# Altium PCB STM8S103F30P6最小系统.PcbDoc
Units mil, origin at the board's own origin, x right, y up, seen from the top; angles counter-clockwise.
Board outline 6000 x 4000 mil, 2 copper layers (Top Layer, Bottom Layer); 28 components, 23 nets, 133 pads, 0 vias.
Unrouted connection lines stored in the file: 9.
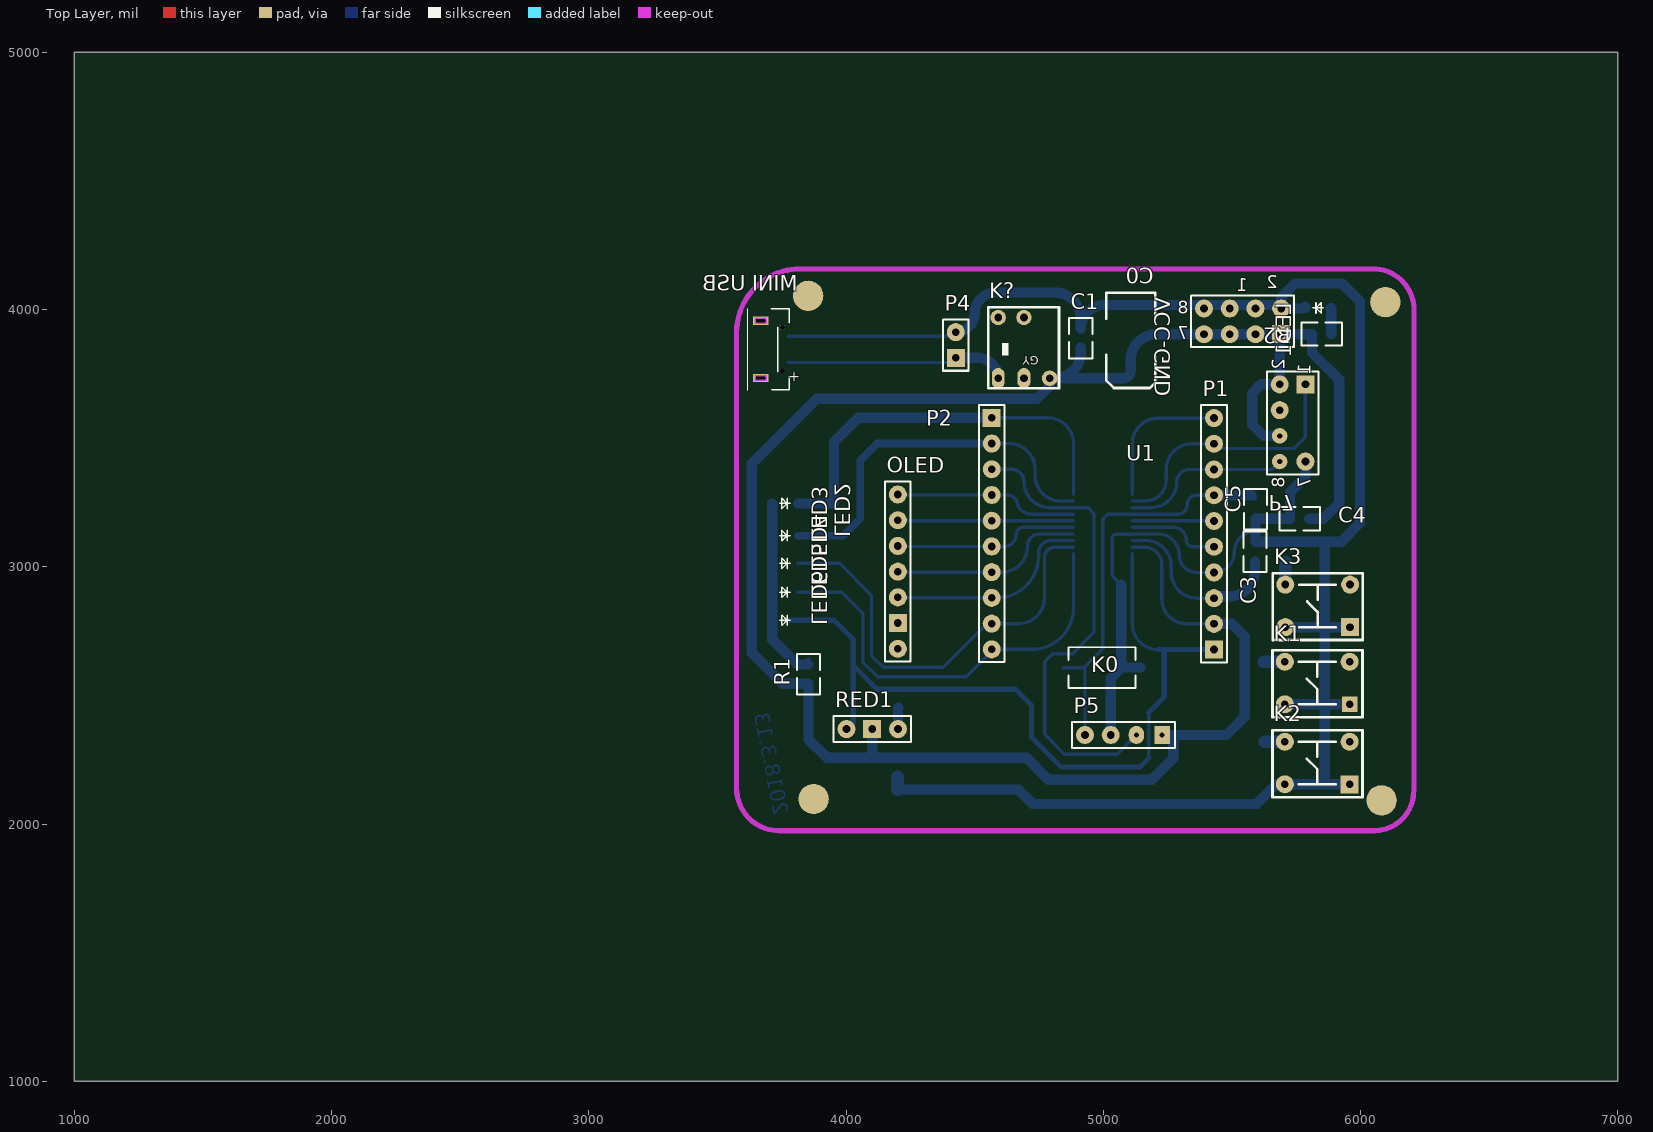
[diagram p0: Top Layer view]
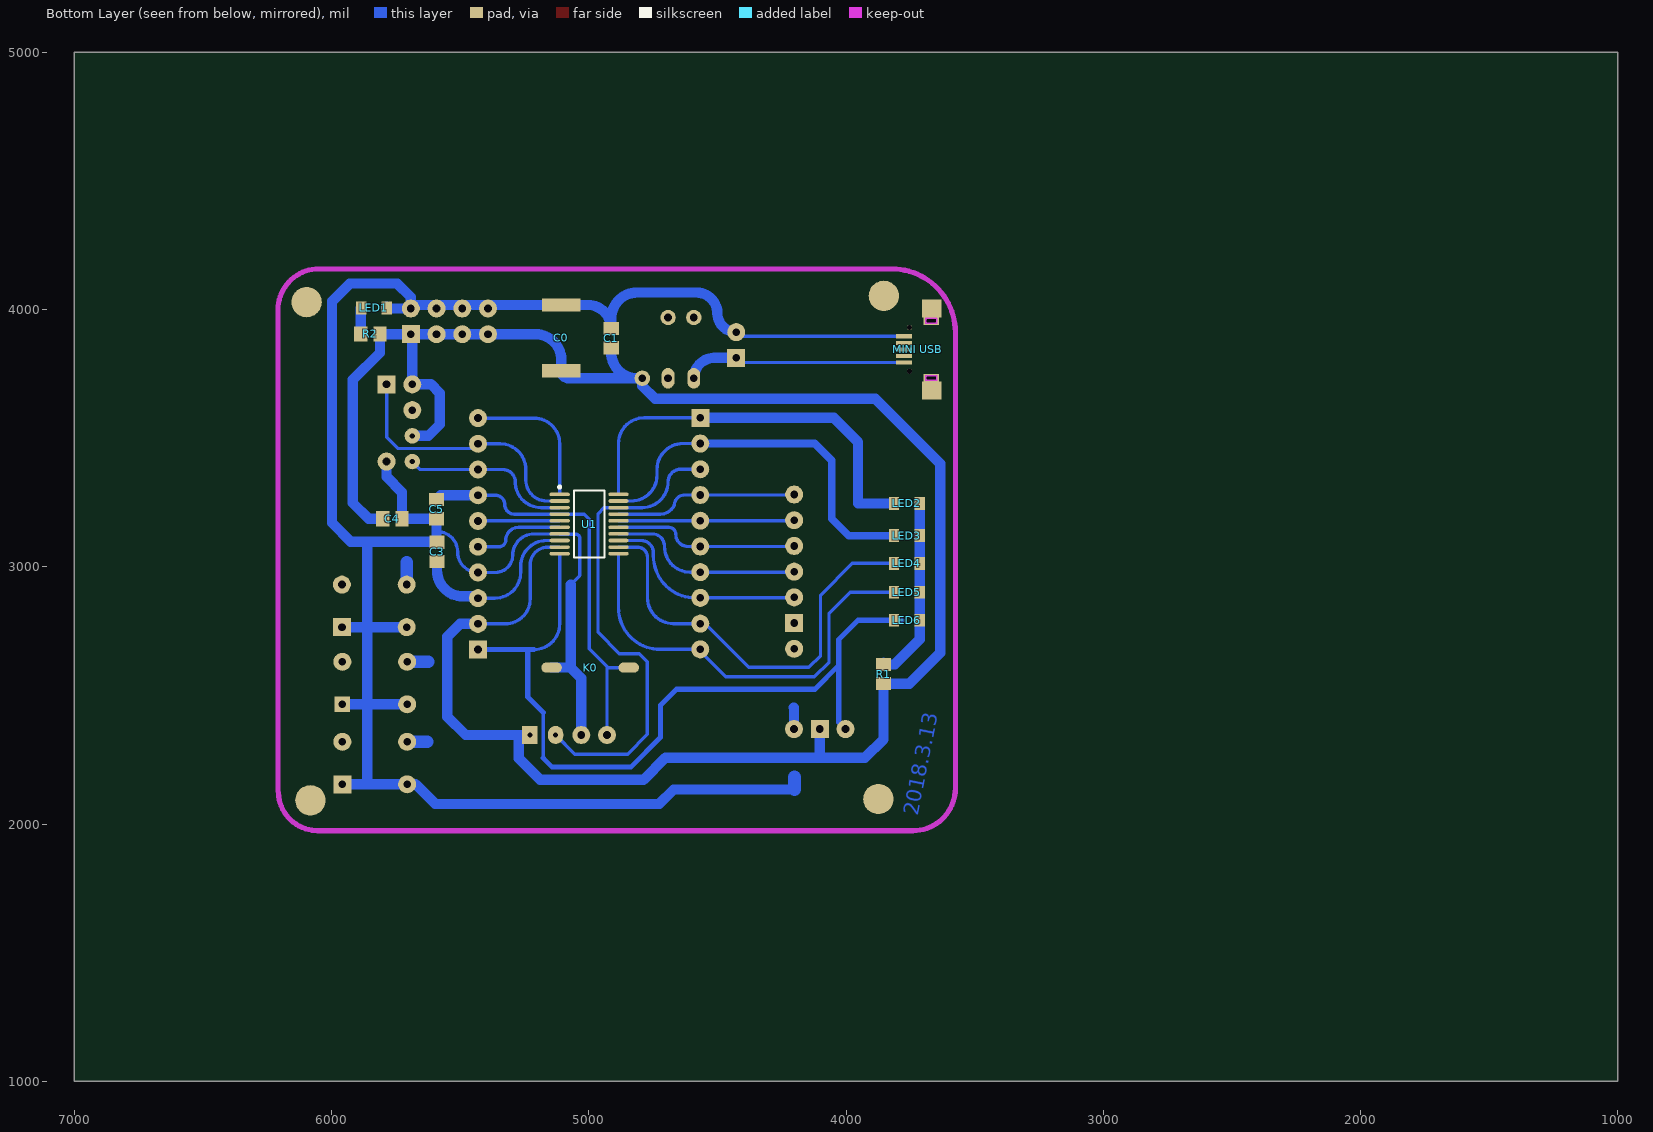
[diagram p1: Bottom Layer view, seen from below]

## Layer stack, top to bottom
Top Solder: solder mask 0.4, Solder Resist, Dk 3.5
Top Layer: signal copper 1.4
Dielectric 1: dielectric 12.6, FR-4, Dk 4.8
Bottom Layer: signal copper 1.4
Bottom Solder: solder mask 0.4, Solder Resist, Dk 3.5

## Board outline
1000,1000 7000,1000 7000,5000 1000,5000

## Design rules (kind name [scope] priority, off if disabled: settings)
Clearance [All] p1: gap=8
PolygonConnect [All] p1: connectstyle=Relief reliefconductorwidth=10 reliefentries=4 polygonreliefangle="90 Angle" airgapwidth=10
RoutingVias [All] p1: holewidth=28 width=50 viastyle="Through Hole" minholewidth=28 minwidth=50 maxholewidth=28 maxwidth=50
SolderMaskExpansion [All] p1: expansion=4
Width [All] p1: maxlimit=50 minlimit=13 preferedwidth=40
30 further rules are at their usual default settings.

## Components (designator, comment, footprint, x,y, rotation, side; value= is the part's Value field where it differs from the comment)
C0 "100uF" "Pol Cap(220uF)" 5191.7,3725 r90 top
C1 "" 0805 4917.7,3889 r270 top
C3 "" 0805 5594.7,3058 r270 top
C4 "0.1uF" 0805 5763.7,3192 r0 top
C5 "0.1uF" 0805 5586.7,3224 r90 top
K0 "Key Press" K_Press 5164.7,2513 r180 top
K1 "" 按键#1 5957,2463 r180 top
K2 "" 按键#2 5957,2152 r180 top
K3 "" 按键#2 5958.7,2763 r180 top
K? "六脚开关" 按钮开关 4591.7,3969 r90 top
LED1 "LED" LED(0805) 5835,4006 r180 top
LED2 "" LED(0805) 3763,3246 r0 top
LED3 "" LED(0805) 3763,3121 r0 top
LED4 "" LED(0805) 3763,3013 r0 top
LED5 "" LED(0805) 3763,2901 r0 top
LED6 "" LED(0805) 3763,2792 r0 top
"MINI USB" "" MICRO-USB 3688,3845 r90 top
OLED "Header 7" HDR1X7 4201.51,2681.01 r90 top
P1 "Header 10" HDR1X10 5430.51,2678.01 r90 top
P2 "Header 10" HDR1X10 4566.51,3579.01 r270 top
P4 "Header 2" HDR1X2 4426.7,3812 r90 top
P5 "Header 4" HDR1X4 5229,2346 r180 top
P7 "WIFI" HDR2X4#1 5786,3709 r270 top
R1 "560R" 0805 3849,2583 r90 top
R2 "560R" 0805 5849,3900 r180 top
RED1 "Header 3" HDR1X3 4002,2369 r0 top
U1 "STM8S003F3P6" "SOP20 - duplicate" 4994.51,3177.01 r0 top
VCC-GND "WIFI" HDR2X4#2 5691.7,3904 r180 top

## Footprints (in the part's own frame and the unit in brackets; to place one, negate y for a bottom-side part, rotate by r counter-clockwise, add the part's x,y. Pads: shape width x height; smd on the part's side, far side on the other; paste and mask are expansions set on the pad)
0805 [mm]
  rect 1.3x1.5 smd far side: 1(-0.95,-0.127) 2(0.95,-0.127)
  silkscreen extent -2,-1.28 2,1.02, body extent -1,-0.76 1,0.5, height 0.55
HDR1X2 [mil] "Connector; Header; 2 Position"
  rect 70x70 hole 30: 1(0,0)
  round 70 hole 30: 2(100,0)
  silkscreen extent -50,-50 150,50
HDR1X3 [mil] "Connector; Header; 3 Position"
  round 70 hole 30: 1(0,0) 3(200,0)
  rect 70x70 hole 30: 2(100,0)
  silkscreen extent -50,-50 250,50
HDR1X4 [mil] "Connector; Header; 4 Position"
  rect 60x70 hole 20: 1(0,0)
  oval 60x70 hole 20: 2(100,0)
  round 70 hole 30: 3(200,0) 4(300,0)
  silkscreen extent -50,-50 350,50
HDR1X7 [mil] "Connector; Header; 7 Position"
  round 70 hole 30: 1(0,0) 3(200,0) 4(300,0) 5(400,0) 6(500,0) 7(600,0)
  rect 70x70 hole 30: 2(100,0)
  silkscreen extent -50,-50 650,50
HDR1X10 [mil] "Connector; Header; 10 Position"
  rect 70x70 hole 30: 1(0,0)
  round 70 hole 30: 2(100,0) 3(200,0) 4(300,0) 5(400,0) 6(500,0) 7(600,0) 8(700,0) 9(800,0) 10(900,0)
  silkscreen extent -50,-50 950,50
HDR2X4#1 [mil] "Connector; Header; 4x2 Position"
  rect 70x70 hole 30: 1(0,0)
  round 70 hole 30: 2(0,-100) 4(100,-100) 7(300,0)
  round 0 all layers, no hole: 3(100,0) 5(200,0)
  round 60 hole 20: 6(200,-100) 8(300,-100)
  silkscreen extent -50,-150 350,50
HDR2X4#2 [mil] "Connector; Header; 4x2 Position"
  rect 70x70 hole 30: 1(0,0)
  round 70 hole 30: 2(0,-100) 3(100,0) 4(100,-100) 5(200,0) 6(200,-100) 7(300,0) 8(300,-100)
  silkscreen extent -50,-150 350,50
K_Press [mil]
  oval 80x40 smd far side: 1(20,-95) 2(320,-95)
  silkscreen extent 40,-174 300,-16, body extent 50,-167 290,-21, height 98
LED(0805) [mil]
  rect 40x50 smd far side: 1(-50,0) 2(50,0)
  silkscreen extent -20,-20 20,20, body extent -37,-25 43,24, height 43
MICRO-USB [mm]
  rect 0.4x1.55 smd far side: 1(-1.3,-2.2) 2(-0.65,-2.2) 3(0,-2.2) 4(0.65,-2.2) 5(1.3,-2.2)
  rect 1.8x1.9 smd far side: 6(-4.05,0.55) 6(4.05,0.55)
  rect 0.8x1.5 hole 0.4 slot 1 at 90 deg: 6(-2.825,0.5) 6(2.825,0.5)
  round 0.5 hole 0.5 unplated: ""(-2.159,-1.651) ""(2.159,-1.651)
  Keep-Out Layer lines w0.127: -3.054,1.043 -2.596,1.043 -2.596,-0.075 -3.054,-0.075 -3.054,1.043 ; 2.596,1.043 3.054,1.043 3.054,-0.075 2.596,-0.075 2.596,1.043
  silkscreen extent -4.05,-2.3 4,1.8
"Pol Cap(220uF)" [mm]
  rect 1.3x3.8 smd far side: 1(0.941,2.159) 2(7.441,2.159)
  silkscreen extent -0.76,-0.25 8.64,4.57
"SOP20 - duplicate" [mm]
  oval 2x0.35 smd far side: 1(3.009,2.647) 2(3.009,1.997) 3(3.009,1.347) 4(3.009,0.697) 5(3.009,0.047) 6(3.009,-0.603) 7(3.009,-1.253) 8(3.009,-1.903) 9(3.009,-2.553) 10(3.009,-3.203) 11(-2.791,-3.203) 12(-2.791,-2.553) 13(-2.791,-1.903) 14(-2.791,-1.253) 15(-2.791,-0.603) 16(-2.791,0.047) 17(-2.791,0.697) 18(-2.791,1.347) 19(-2.791,1.997) 20(-2.791,2.647)
按钮开关 [mil]
  oval 80x50 hole 30: 1(-236.22,0) 2(-236.22,-100)
  round 60 hole 30: 3(-236.22,-200) 5(0,-100) 6(0,0)
  round 0 all layers, no hole: 4(0,-200)
  silkscreen extent -276,-236 39,39
按键#1 [mil]
  rect 60x60 hole 30: 1(-0.98,-2.32)
  round 70 hole 30: 1(250.98,-2.32) 2(-0.98,-167.68) 2(250.98,-167.68)
  silkscreen extent -51,-212 299,48
按键#2 [mil]
  rect 70x70 hole 30: 1(-0.98,-2.32)
  round 70 hole 30: 1(250.98,-2.32) 2(-0.98,-167.68) 2(250.98,-167.68)
  silkscreen extent -51,-212 299,48

## Part data
C0: library part "pol cap", "通用有极电容"
C1 C3 C4 C5: library part Cap, "无极电容"
K0: library part K_Press, "贴片按键"
K1 K2 K3: library part 按键
K?: "按钮开关"
LED1: "发光二极管"
LED2 LED3 LED4 LED5 LED6: library part LED, "发光二极管"
"MINI USB": library part Component_1
OLED: "Header, 7-Pin"
P1 P2: "Header, 10-Pin"
P4: "Header, 2-Pin"
P5: "Header, 4-Pin"
P7 VCC-GND: library part "Header 4X2", "Header, 4-Pin, Dual row"
R1 R2: library part Res, "通用电阻"
RED1: "Header, 3-Pin"

## Free pads (board coordinates)
  round 118.11 all layers, no hole: 0(3853,4053) 0(3874,2097) 0(6082,2092) 0(6097,4029)

## Nets (pads, with @x,y where several pads share a name; then routed paths per layer and width w, separated by ;. In a path a pad name is that pad's centre, name@x,y a point inside that pad or via, vN(x,y) a via of type N, cw(c..) or ccw(c..) an arc to the next point about the centre after c; other vN are vias at no path point)
A1: K1.2 P1.6 U1.5 | length 400
  Bottom Layer w13: U1.5 5429.66,3178.86 cw(c5429.66,3178.01) P1.6
  Bottom Layer w50: 5624,2630.68 K1.2@5706.02,2630.68
A2: K2.2 P1.5 U1.6 | length 438.5
  Bottom Layer w13: U1.6 5272.43,3153.27 cw(c5272.43,3103) 5322.7,3103 ccw(c5347.69,3103) 5347.69,3078.01 P1.5
  Bottom Layer w50: 5628,2319.68 K2.2@5706.02,2319.68
A3: LED6.2 P1.1 RED1.1 U1.10 | length 3263
  Bottom Layer w13: RED1.1 4028,2395 ; U1.10 5112.97,2778.01 ccw(c5212.97,2778.01) 5212.97,2678.01 ; 5177,2256 5177,2434
  Bottom Layer w20: 3783,2792 LED6.2 3953,2792 4028,2717 ; 4028,2395 4028,2717 ; 5177,2256 5142,2221 4837,2221 4721,2337 4721,2462 4659,2524 4121,2524 4028,2617 4028,2717 ; 5177,2434 5237,2494 5237,2678.01 ; 5212.97,2678.01 5237,2678.01 ; 5364.01,2678.01 5331.01,2678.01 ; P1.1 5331.01,2678.01 ; 5237,2678.01 5331.01,2678.01
B4: LED4.2 P2.9 U1.12 | length 1685.2
  Bottom Layer w13: LED4.2 3976,3013 4099,2890 4099,2654 4144,2609 4378,2609 4548.01,2779.01 P2.9 4671.7,2779.01 ccw(c4671.7,2879.01) 4771.7,2879.01 4771.7,3037 cw(c4811.2,3037) 4811.2,3076.49 U1.12
B5: LED5.2 P2.10 U1.11 | length 1666.2
  Bottom Layer w13: LED5.2 3984,2901 4066,2819 4066,2629 4123,2572 4467.99,2572 4575,2679.01 4723.27,2679.01 ccw(c4723.27,2840.37) 4884.63,2840.37 U1.11
C3: OLED.3 P2.8 U1.13 | length 816.7
  Bottom Layer w13: OLED.3 4203.51,2879.01 P2.8 4585.26,2879.01 ccw(c4585.26,3042.45) 4748.7,3042.45 4748.7,3055 cw(c4795.79,3055) 4795.79,3102.09 U1.13
C4: OLED.4 P2.7 U1.14 | length 769.7
  Bottom Layer w13: OLED.4 4203.51,2979.01 P2.7 4605.7,2979.01 ccw(c4605.7,3079.01) 4705.7,3079.01 4705.7,3081 cw(c4752.38,3081) 4752.38,3127.68 U1.14
C5: OLED.5 P2.6 U1.15 | length 723.5
  Bottom Layer w13: OLED.5@4203.51,3079.01 P2.6 4614.71,3079.01 ccw(c4614.71,3126) 4661.7,3126 cw(c4688.97,3126) 4688.97,3153.27 U1.15
C6: OLED.6 P2.5 U1.16 | length 684.1
  Bottom Layer w13: OLED.6 4203.51,3179.01 P2.5 4884.63,3179.01 U1.16
C7: OLED.7 P2.4 U1.17 | length 717.6
  Bottom Layer w13: OLED.7@4203.51,3279.01 P2.4 4628.01,3279.01 cw(c4628.01,3239.85) 4661.96,3259.36 cw(c4628.01,3239.85) 4667.17,3239.85 ccw(c4722.25,3265) 4722.25,3204.45 U1.17
"D1 SWIM": P2.3 P5.2 U1.18 | length 1896.2
  Bottom Layer w13: P2.3 4642.73,3379.01 cw(c4642.73,3330.04) 4691.7,3330.04 ccw(c4791.7,3330.04) 4791.7,3230.04 U1.18 4940.96,3230.04 4964,3207 4964,2745 4881,2662 4803,2662 4772,2631 4772,2348 4849,2271 5054,2271 P5.2
D2: LED3.2 P2.2 U1.19 | length 1489.8
  Bottom Layer w13: P2.2 4634.7,3479.01 cw(c4634.7,3379.01) 4734.7,3379.01 4734.7,3355.63 ccw(c4834.7,3355.63) 4834.7,3255.63 U1.19
  Bottom Layer w30: LED3.2 3989,3121 4055,3187 4055,3413 4121.01,3479.01 P2.2
D3: LED2.2 P2.1 U1.20 | length 1603.8
  Bottom Layer w13: P2.1 4784.63,3579.01 cw(c4784.63,3479.01) 4884.63,3479.01 U1.20
  Bottom Layer w40: LED2.2 3953,3246 3953,3484 4048.01,3579.01 P2.1
D4: K3.2 P1.10 U1.1 | length 657.4
  Bottom Layer w13: U1.1 5112.97,3478.01 cw(c5212.97,3478.01) 5212.97,3578.01 P1.10
  Bottom Layer w50: K3.2@5707.72,2930.68 5707.72,3016.72
D5: P1.9 P7.1 U1.2 | length 1048.2
  Bottom Layer w13: U1.2 5163.33,3255.63 ccw(c5163.33,3337) 5244.7,3337 5244.7,3378.01 cw(c5344.7,3378.01) 5344.7,3478.01 P1.9 5448.51,3460 5742,3460 5786,3504 P7.1
D6: P1.8 P7.8 U1.3 | length 670.3
  Bottom Layer w13: U1.3 5185.7,3230.04 ccw(c5185.7,3330.04) 5285.7,3330.04 cw(c5333.67,3330.04) 5333.67,3378.01 P1.8 5655.01,3378.01 P7.8
GND: "MINI USB.5" C0.2 C1.1 C3.1 C4.1 C5.1 K0.1 K1.1 K2.1 K3.1 LED1.2 OLED.1 P1.4 P4.2 P5.3 P7.7 RED1.3 U1.7 VCC-GND.2 VCC-GND.4 VCC-GND.6 VCC-GND.8 | length 9447.7
  Bottom Layer w13: 3774.61,3896.18 4410.88,3896.18 ccw(c4410.88,3912) P4.2 ; 5066.7,2934 5034.7,2966 5034.7,3110 cw(c5051.7,3110) 5051.7,3127 5112.97,3127 U1.7 5213.03,3127.68 cw(c5213.03,3045) 5295.7,3045 ccw(c5362.69,3045) 5362.69,2978.01 P1.4 ccw(c5430.51,3057.2) 5509.7,3057.2 cw(c5589.24,3057.2) 5589.24,3136.74 5591.7,3136.74
  Bottom Layer w40: 4200,2134 4670,2134 4726,2078 5597,2078 5673.32,2154.32 5706.02,2154.32 5861,2154.32 ; RED1.3 4202,2452 4203,2453 ; P4.2 ccw(c4426.7,3985.3) 4500,3985.3 cw(c4580.7,3985.3) 4580.7,4066 4812.7,4066 cw(c4812.7,3966) 4912.7,3966 C1.1 cw(c5004.25,3926.4) 5004.25,4017.95 C0.2 5677.75,4017.95 cw(c5677.75,4004) VCC-GND.2 ; P5.3 5029,2567 5070,2608 ; 5070,2930.7 5070,2608 ; K0.1 5070,2608 ; K1.1@5706.02,2465.32 5854.32,2465.32 5861,2472 ; K3.1@5707.72,2765.32 5861,2765.32 ; LED1.2 5785,4011 5778,4004 VCC-GND.2 ; P7.7 5786,3350 5726.3,3290.3 C4.1 5726.3,3186.6 C5.1 5591.7,3136.74 5591.7,3097.4 5861,3097.4 ; K2.1@5957.98,2154.32 5861,2154.32 ; K1.1@5957.98,2465.32 5861,2465.32 ; K3.1@5959.69,2765.32 5861,2765.32 ; VCC-GND.2 5691.7,4048.7 5744,4101 5929,4101 5998,4032 5998,3170 5925.4,3097.4 5861,3097.4 ; 5861,2154.32 5861,2465.32 ; 5861,2465.32 5861,2472 ; 5861,2472 5861,2765.32 ; 5861,2765.32 5861,3097.4
  Bottom Layer w50: 4200,2134 4200,2183
NetK?_1: "MINI USB.1" K?.1 P4.1 | length 872.7
  Bottom Layer w13: 3774.61,3793.82 4408.52,3793.82 ccw(c4408.52,3812) P4.1
  Bottom Layer w40: P4.1 4512.48,3812 cw(c4512.48,3732.78) K?.1
NetLED1_1: LED1.1 R2.1 | length 101.6
  Bottom Layer w40: LED1.1 5886.4,4004.6 R2.1
NetLED2_1: LED2.1 LED3.1 LED4.1 LED5.1 LED6.1 R1.2 | length 726
  Bottom Layer w20: R1.2 R1.2@3854,2637
  Bottom Layer w40: LED2.1 LED3.1 LED4.1 LED5.1 LED6.1 3713,2718 3810.6,2620.4 R1.2
NRST: C5.2 K0.2 P1.7 P5.4 U1.4 | length 1602.8
  Bottom Layer w13: K0.2 4925,2608 4998,2681 4998,3185 5017.45,3204.45 U1.4 5289.15,3204.45 ccw(c5289.15,3242) 5326.7,3242 cw(c5362.71,3242) 5362.71,3278.01 P1.7 ; P5.4 4929,2608 ; C5.2@5575.1,3278.01 cw(c5575.1,3261.4) C5.2
  Bottom Layer w40: P1.7 C5.2@5575.1,3278.01
VCAP: C3.2 P1.3 U1.8 | length 711.6
  Bottom Layer w13: U1.8 5164.7,3102.09 cw(c5164.7,3002.09) 5264.7,3002.09 5264.7,2978.01 ccw(c5364.7,2978.01) 5364.7,2878.01 P1.3 cw(c5437.5,2878.01) P1.3@5437.5,2885
  Bottom Layer w40: P1.3@5437.5,2885 5489.7,2885 ccw(c5489.7,2985) 5589.7,2985 C3.2
VCC: C0.1 C1.2 C4.2 K?.3 OLED.2 P1.2 P5.1 P7.2 P7.6 R1.1 R2.2 RED1.2 U1.9 VCC-GND.1 VCC-GND.3 VCC-GND.5 VCC-GND.7 | length 8316.7
  Bottom Layer w13: U1.9 5158.21,3076.49 cw(c5158.21,3007) 5227.7,3007 5227.7,2875 ccw(c5324.69,2875) 5324.69,2778.01 P1.2
  Bottom Layer w40: 4102,2260 RED1.2 ; C1.2 4912.7,3832.78 cw(c4812.7,3832.78) K?.3@4812.7,3732.78 ; P5.1 5272,2346 ; P1.2 5499.99,2778.01 5550,2728 5550,2417 5479,2346 5272,2346 ; P7.6 5623,3509 5579,3553 5579,3675 5613,3709 P7.2 5686,3898.3 VCC-GND.1 ; C4.2 5856,3187 5917,3248 5917,3727 5811.6,3832.4 R2.2 5810.6,3904 VCC-GND.1 ; K?.3@4812.7,3732.78 K?.3 4791.7,3702.7 4742,3653 3886,3653 3634,3401 3634,2666 3754.4,2545.6 R1.1 3854,2330 3927,2257 4702,2257 4787,2172 5189,2172 5272,2255 5272,2346 ; K?.3@4812.7,3732.78 5077.43,3732.78 ccw(c5077.43,3762.05) C0.1 5106.7,3804 cw(c5206.7,3804) 5206.7,3904 VCC-GND.7 VCC-GND.5 VCC-GND.3 VCC-GND.1
pads on no net: "MINI USB.2" "MINI USB.3" "MINI USB.4" "MINI USB.6" "MINI USB." K?.2 K?.4 K?.5 K?.6 P7.3 P7.4 P7.5

## Keep-outs
Keep-Out Layer:
  lines w20: 6048.84,1974.09 ccw(c6053.9,2126.64) 6206.45,2121.58 ; 6053.9,1974.01 3739.56,1974.01 cw(c3739.56,2138.76) 3574.81,2138.76 3574.81,3911.27 cw(c3821.54,3911.27) 3821.54,4158.01 6049.41,4158.01 cw(c6049.41,3999.41) 6208,3999.41 6208,2126.64

## Other copper
Bottom Layer:
  text "2018.3.13" at 3701,2026 h100 r281.28

## Text inside footprints (layer, text, board x,y; h text height)
K?: Top Overlay "GY" at 4749.7,3830 h55 r180
"MINI USB": Top Overlay "+" at 3780.52,3715.08 h39.37 r270
P7: Top Overlay "8" at 5706,3349 h50 r90; Top Overlay "7" at 5806,3349 h50 r90; Top Overlay "1" at 5806,3789 h50 r90; Top Overlay "2" at 5706,3809 h50 r90
VCC-GND: Top Overlay "8" at 5331.7,3984 h50; Top Overlay "7" at 5331.7,3884 h50; Top Overlay "1" at 5561,4071 h50; Top Overlay "2" at 5679,4083 h50